# Altium PCB WatcherJet.PcbDoc (part 1 of 3)
Units mm, origin at the board's own origin, x right, y up, seen from the top; angles counter-clockwise.
Board outline 160 x 115 mm, 2 copper layers (Top Layer, Bottom Layer); 119 components, 123 nets, 459 pads, 208 vias.
Unrouted connection lines stored in the file: 1.
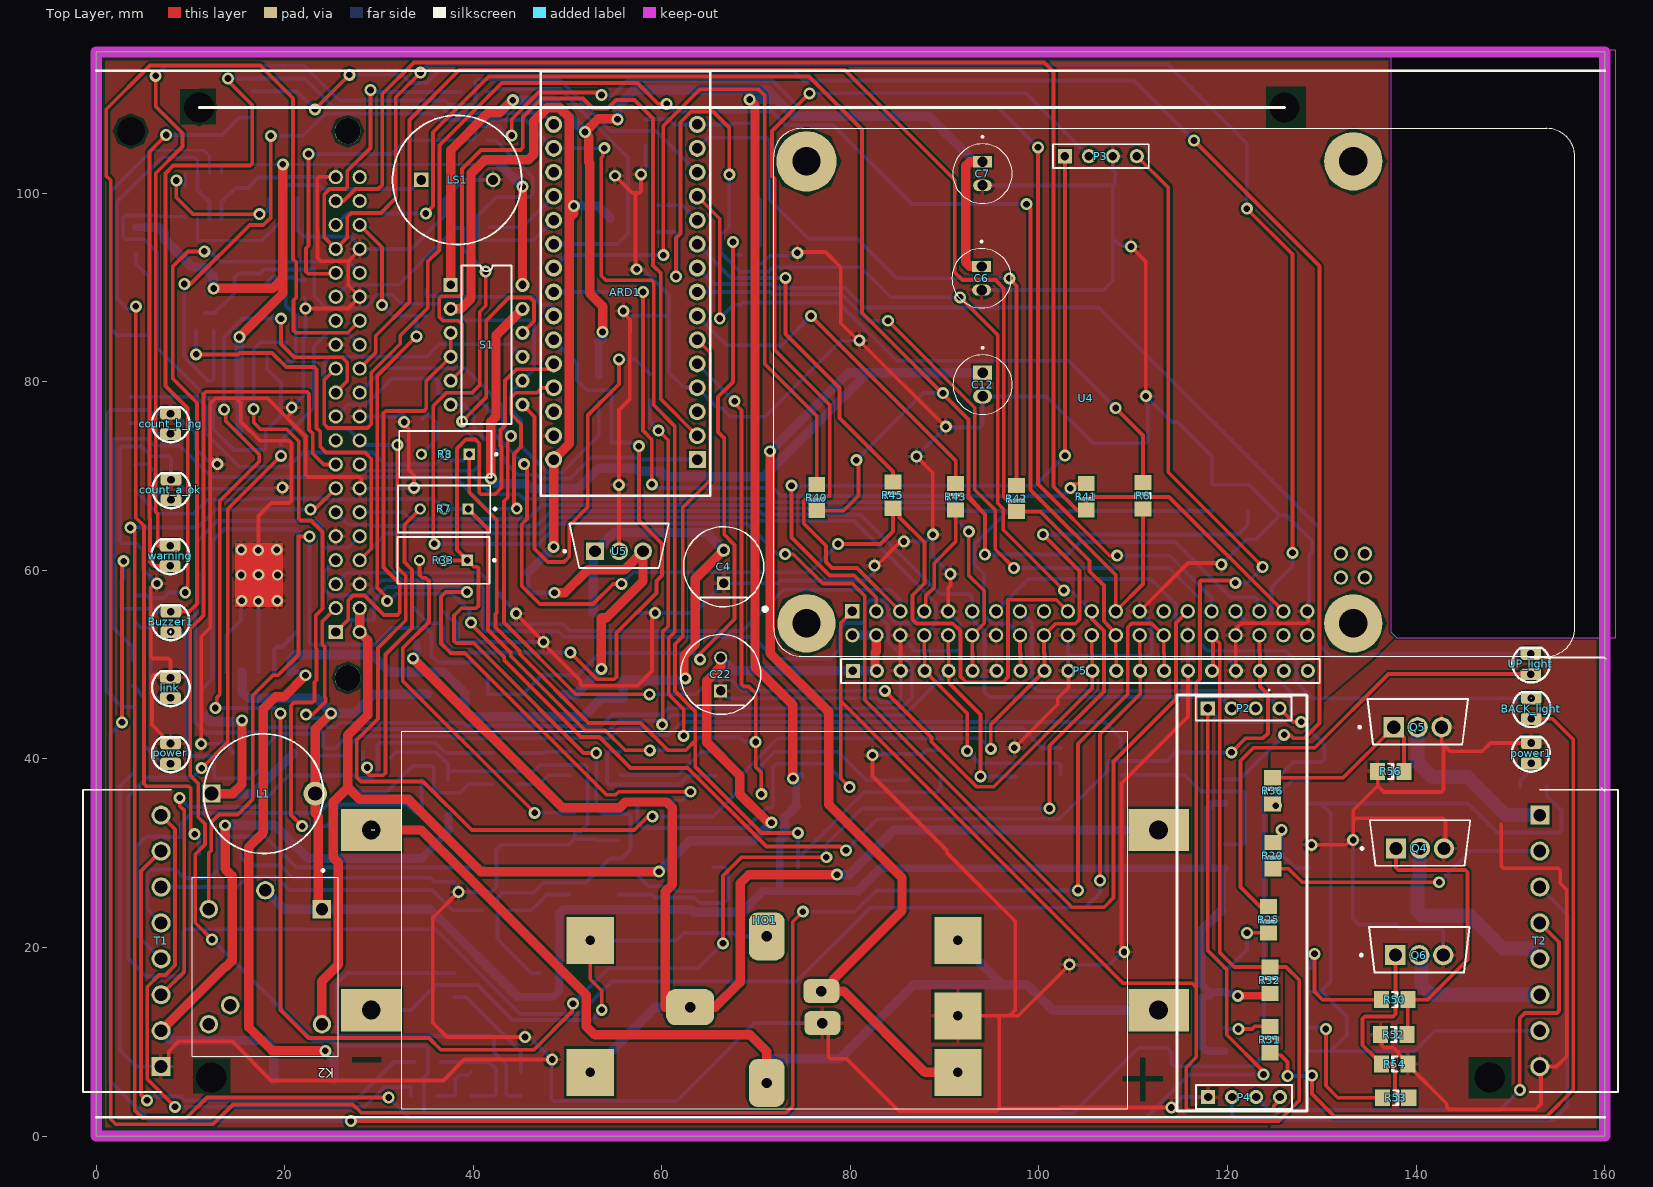
[diagram p0: Top Layer view]
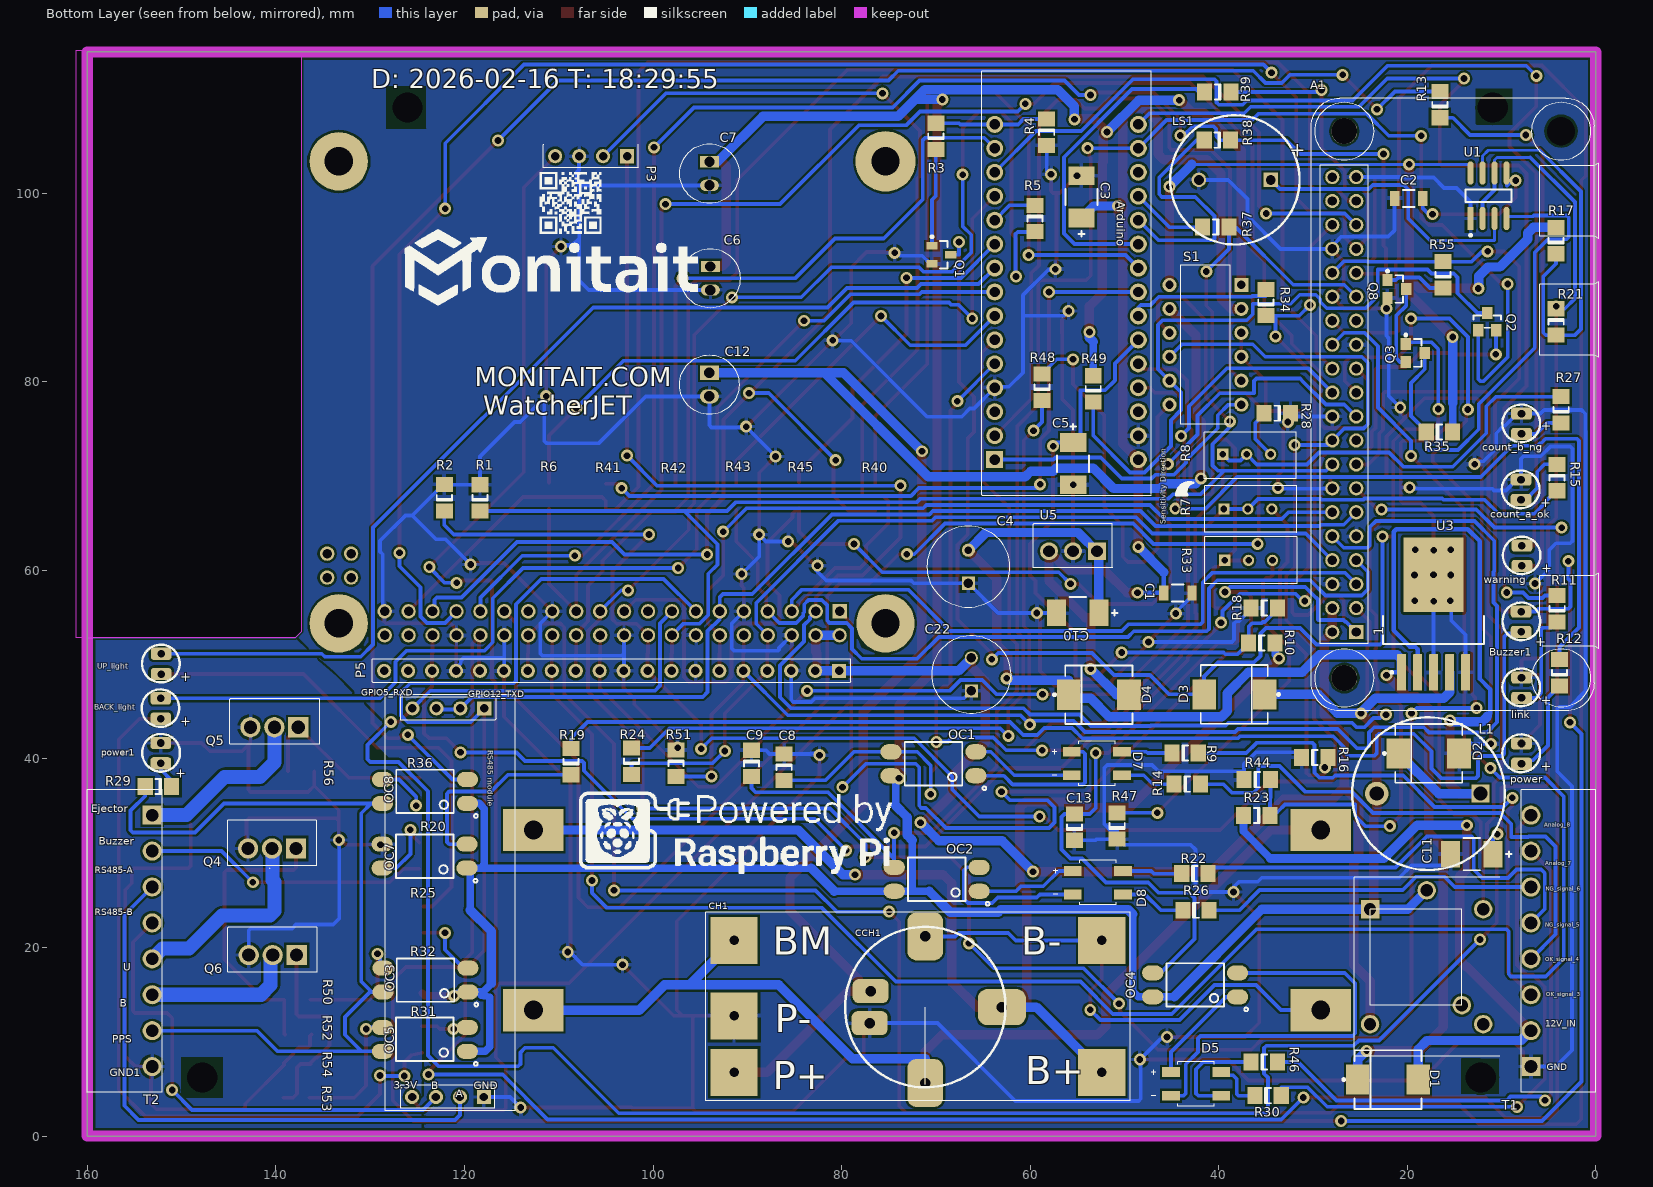
[diagram p1: Bottom Layer view, seen from below]

## Layer stack, top to bottom
Top Solder: solder mask 0.0102, Solder Resist, Dk 3.5
Top Layer: signal copper 0.0356
Dielectric 1: dielectric 0.32, FR-4, Dk 4.8
Bottom Layer: signal copper 0.0356
Bottom Solder: solder mask 0.0102, Solder Resist, Dk 3.5

## Board outline
0,0 159.999,0 159.999,115 0,115
cut-out: 137.315,53.505 137.967,52.853 161.191,52.853 161.194,115.163 137.315,115.163

## Design rules (kind name [scope] priority, off if disabled: settings)
Clearance Clearance_1 [All] p1: gap=0.254 ignorepadtopadclearanceinfootprint=FALSE except(0.7: SMDPad-Via THPad-Via Via-Via)
Clearance [All] p2: gap=0.2 ignorepadtopadclearanceinfootprint=FALSE
ComponentClearance [All] p1: gap=0 collisioncheckmode=3 verticalgap=0 showdistances=FALSE
PolygonConnect [All] p1: connectstyle=Relief reliefconductorwidth=0.4 reliefentries=4 polygonreliefangle="90 Angle" airgapwidth=0.3
RoutingVias [All] p1: holewidth=0.711 width=1.27 viastyle="Through Hole" minholewidth=0.711 minwidth=1.27 maxholewidth=0.711 maxwidth=1.27
SMDNeckDown [All] p1: percent=50.000
SilkToSilkClearance [All] p1: silktosilkclearance=-0.025
SolderMaskExpansion [All] p1: expansion=0.102 istentingtop=FALSE
UnConnectedPin [All] p1:
UnRoutedNet [All] p1: checkbadconnections=TRUE
Width "Schematic Width Constraint_15" [InNet('U')] p1: maxlimit=2 minlimit=0.254 preferedwidth=1 minimp=50.000000 maximp=50.000000 favimp=50.000000
Width "Schematic Width Constraint_14" [InNet('B')] p2: maxlimit=2 minlimit=0.254 preferedwidth=1 minimp=50.000000 maximp=50.000000 favimp=50.000000
Width "Schematic Width Constraint_13" [InNet('3.7v')] p3: maxlimit=2 minlimit=0.254 preferedwidth=1 minimp=50.000000 maximp=50.000000 favimp=50.000000
Width "Schematic Width Constraint_2" [InNet('7.4v')] p4: maxlimit=2 minlimit=0.254 preferedwidth=1 minimp=50.000000 maximp=50.000000 favimp=50.000000
Width "Schematic Width Constraint_12" [InNet('AR_IN_9V')] p5: maxlimit=2 minlimit=0.254 preferedwidth=1 minimp=50.000000 maximp=50.000000 favimp=50.000000
Width "Schematic Width Constraint_6" [InNet('SW12')] p6: maxlimit=2 minlimit=0.254 preferedwidth=1 minimp=50.000000 maximp=50.000000 favimp=50.000000
Width "Schematic Width Constraint_10" [InNet('NetD2_1')] p7: maxlimit=2 minlimit=0.254 preferedwidth=1 minimp=50.000000 maximp=50.000000 favimp=50.000000
Width "Schematic Width Constraint_8" [InNet('NetC4_2')] p8: maxlimit=2 minlimit=0.254 preferedwidth=1 minimp=50.000000 maximp=50.000000 favimp=50.000000
Width "Schematic Width Constraint_7" [InNet('5V')] p9: maxlimit=2 minlimit=0.254 preferedwidth=1 minimp=50.000000 maximp=50.000000 favimp=50.000000
Width "Schematic Width Constraint_3" [InNet('SW11')] p10: maxlimit=2 minlimit=0.254 preferedwidth=1 minimp=50.000000 maximp=50.000000 favimp=50.000000
Width "Schematic Width Constraint_1" [InNet('5V_RPI')] p11: maxlimit=2 minlimit=0.254 preferedwidth=1 minimp=50.000000 maximp=50.000000 favimp=50.000000
Width "Schematic Width Constraint" [InNet('12V-24V-INPUT')] p12: maxlimit=2 minlimit=0.254 preferedwidth=1 minimp=50.000000 maximp=50.000000 favimp=50.000000
Width [All] p13: maxlimit=4 minlimit=0.1 preferedwidth=0.4
27 further rules are at their usual default settings.

## Components (designator, comment, footprint, x,y, rotation, side; value= is the part's Value field where it differs from the comment)
A1 "ADA3708" ADA3708_RPI-ZERO 26.67,77.597 r90 bottom
ARD1 "Nano R3" Arduino_Nano_R3 56.134,89.535 r180 top
BACK_light "LED5_BLUE" LED-3mm#1 152.343,45.288 r180 top
Buzzer1 "LED1_RED" LED-3mm#2 7.793,54.495 r0 top
C1 "0.1UF" FP-1206-L_3_2_0_2-W_1_6_0-MFG 44.321,57.587 r180 bottom
C2 "0.1UF" FP-1206-L_3_2_0_2-W_1_6_0-MFG 19.835,99.469 r0 bottom
C3 "10UF" FP-TAJC-MFG 54.546,99.618 r270 bottom
C4 "1000uF" FP-RAD-TH-D_8_0_5-L_15_1-MFG#1 66.547,60.399 r90 top
C5 "10UF" FP-TAJC-MFG 55.437,71.333 r90 bottom
C6 "220uF16v" CAPPRD250W50D630H1650#1 93.911,90.989 r270 top
C7 "220uF16v" CAPPRD250W50D630H1650#1 94.008,102.096 r270 top
C8 "C1206" 1206 86.087,39.137 r270 bottom value=100nF
C9 "C1206" 1206 89.559,39.522 r270 bottom value=10nf
C10 "10UF" FP-TAJC-MFG 54.958,55.491 r180 bottom
C11 "10UF" FP-TAJC-MFG 13.139,29.901 r180 bottom
C12 "220uF16v" CAPPRD250W50D630H1650#2 94.019,79.713 r270 top
C13 "C1206" 1206 55.295,32.774 r90 bottom value=100nF
C22 "1000uF" FP-RAD-TH-D_8_0_5-L_15_1-MFG#2 66.229,48.97 r90 top
CCH1 "CCH" PCBComponent_1#1 71.119,13.679 r180 bottom
CH1 "2-cell charer module" PCBComponent_1#2 49.397,23.752 r0 bottom
count_a_ok "LED5_BLUE" LED-3mm#1 8.05,68.498 r180 top
count_b_ng "LED3_BLUE" LED-3mm#1 7.998,75.497 r180 top
D1 "SS34-E3/57T" FP-95402-MFG#1 22.032,5.988 r180 bottom
D2 "SS34-E3/57T" FP-95402-MFG#2 17.714,40.586 r180 bottom
D3 "SS34-E3/57T" FP-95402-MFG#1 38.339,46.845 r0 bottom
D4 "SS34-E3/57T" FP-95402-MFG#1 52.711,46.818 r180 bottom
D5 "MB10F-13" DIOB_MB10F-13 42.397,5.526 r180 bottom
D7 "MB10F-13" DIOB_MB10F-13 52.91,39.518 r180 bottom
D8 "MB10F-13" DIOB_MB10F-13 52.8,26.879 r180 bottom
HO1 "2-cell battry holder" PCBComponent_1#3 109.414,42.916 r180 top
K2 "1-1721150-3" RELAY_1-1721150-3 17.931,17.966 r270 top
L1 "AIUR-06-100K" ABRA-AIUR-06-2_V 17.741,36.323 r0 top
link "LED4_RED" LED-3mm#1 7.996,47.496 r180 top
LS1 "KPEG242" KINGS-KPEG242-2 38.279,101.43 r0 top
OC1 "PC81713NIP0X" SOT254P1025X400-4N 70.25,39.492 r0 bottom
OC2 "PC81713NIP0X" SOT254P1025X400-4N 69.906,27.238 r0 bottom
OC3 "PC81713NIP0X" SOT254P1025X400-4N 124.138,16.548 r0 bottom
OC4 "PC81713NIP0X" SOT254P1025X400-4N 42.487,16.033 r0 bottom
OC5 "PC81713NIP0X" SOT254P1025X400-4N 124.194,10.255 r0 bottom
OC7 "a" SOT254P1025X400-4N 124.232,29.688 r0 bottom
OC8 "a" SOT254P1025X400-4N 124.185,36.555 r0 bottom
P2 "Header 4" HDR1X4 117.895,45.364 r0 top
P3 "Header 4" HDR1X4 102.758,103.943 r0 top
P4 "Header 4" HDR1X4 117.941,4.142 r0 top
P5 "Header 20" HDR1X20 80.256,49.346 r0 top
power "LED2_GREEN" LED-3mm#1 8,40.5 r180 top
power1 "LED2_GREEN" LED-3mm#2 152.085,40.552 r0 top
Q1 "BCX19" ONSC-SOT-23-3-318-08_V#1 69.404,93.493 r180 bottom
Q2 "BSS138" FP-318-08-IPC_B 11.515,86.388 r90 bottom
Q3 "BCX19" ONSC-SOT-23-3-318-08_V#2 19.139,83.072 r180 bottom
Q4 "IRF3205LPBF" FP-PG-TO262-3-MFG 140.416,31.087 r90 top
Q5 "IRF3205LPBF" FP-PG-TO262-3-MFG 140.165,43.951 r90 top
Q6 "IRF3205LPBF" FP-PG-TO262-3-MFG 140.345,19.778 r90 top
Q8 "BCX19" ONSC-SOT-23-3-318-08_V#2 21.086,89.854 r180 bottom
R1 "33K" 1206 118.352,67.69 r90 bottom
R2 "33K" 1206 122.142,67.719 r90 bottom
R3 "1K" 1206 70.004,106.033 r90 bottom
R4 "1K" 1206 58.243,106.474 r270 bottom
R5 "1K" 1206 59.494,97.332 r270 bottom
R6 "1K" 1206 111.04,67.932 r270 top
R7 "3296W-1-103LF" FP-3296W-MFG#1 36.897,66.516 r90 top
R8 "3296W-1-103LF" FP-3296W-MFG#1 37.026,72.319 r90 top
R9 "1K" 1206 43.557,40.62 r180 bottom
R10 "33K" 1206 35.415,52.292 r180 bottom
R11 "1K" 1206 4.089,55.931 r90 bottom
R12 "1K" 1206 3.835,49.156 r90 bottom
R13 "270OHM" 1206 16.538,109.416 r90 bottom
R14 "1K" 1206 43.326,37.322 r180 bottom
R15 "1K" 1206 4.099,69.853 r270 bottom
R16 "1K" 1206 29.82,40.157 r180 bottom
R17 "68K" 1206 4.211,94.994 r90 bottom
R18 "33K" 1206 35.146,56.009 r180 bottom
R19 "270OHM" 1206 108.702,39.728 r90 bottom
R20 "1K" 1206 124.804,29.753 r90 top
R21 "68K" 1206 4.191,86.36 r270 bottom
R22 "1K" 1206 42.516,27.831 r180 bottom
R23 "68K" 1206 35.961,33.995 r0 bottom
R24 "10K" 1206 102.272,39.764 r90 bottom
R25 "270OHM" 1206 124.366,22.96 r90 top
R26 "1K" 1206 42.4,23.954 r180 bottom
R27 "1K" 1206 3.659,77.03 r90 bottom
R28 "1K" 1206 33.783,76.675 r0 bottom
R29 "1K" 1206 152.463,37.072 r0 bottom
R30 "1K" 1206 34.761,4.278 r180 bottom
R31 "270OHM" 1206 124.496,10.236 r270 top
R32 "1K" 1206 124.495,16.543 r270 top
R33 "3296W-1-103LF" FP-3296W-MFG#2 36.825,61.061 r90 top
R34 "1K" 1206 34.999,88.422 r90 bottom
R35 "68K" 1206 16.573,74.678 r180 bottom
R36 "1K" 1206 124.773,36.606 r270 top
R37 "1K" 1206 40.313,96.415 r0 bottom
R38 "1K" 1206 40.122,105.64 r0 bottom
R39 "1K" 1206 40.096,110.755 r0 bottom
R40 "1K" 1206 76.427,67.736 r90 top
R41 "1K" 1206 105.012,67.806 r90 top
R42 "1K" 1206 97.625,67.63 r90 top
R43 "1K" 1206 91.159,67.811 r270 top
R44 "33K" 1206 35.907,37.799 r180 bottom
R45 "1K" 1206 84.512,67.992 r270 top
R46 "1K" 1206 35.174,7.841 r180 bottom
R47 "1K" 1206 50.761,32.889 r90 bottom
R48 "2.2K" 1206 58.726,79.439 r90 bottom
R49 "10K" 1206 53.301,79.255 r90 bottom
R50 "1K" 1206 137.728,14.464 r180 top
R51 "3.3K" 1206 97.56,39.554 r270 bottom
R52 "1K" 1206 137.632,10.762 r180 top
R53 "1K" 1206 137.825,4.062 r180 top
R54 "1K" 1206 137.735,7.637 r0 top
R55 "10K" 1206 16.199,91.355 r90 bottom
R56 "1K" 1206 137.33,38.689 r180 top
S1 "SW DIP-6" DIP-12/SW 41.402,83.936 r270 top
T1 "1803332" SHDRRA8W83P0X381_1X8_3187X920X 6.873,20.701 r90 top
T2 "1803332" SHDRRA8W83P0X381_1X8_3187X920X 153.126,20.704 r270 top
U1 "NE555DRG4" FP-D0008A-IPC_A 11.368,99.744 r90 bottom
U3 "LM2596SX-ADJ/NOPB" KTT0005B_L 17.199,55.392 r90 bottom
U4 "RASPBERRY_PI_3_MODEL_B+" MODULE_RASPBERRY_PI_3_MODEL_B+ 114.338,78.892 r0 top
U5 "LM7815CT/NOPB" FP-NDE0003B-MFG 55.453,62.61 r90 top
UP_light "LED5_BLUE" LED-3mm#1 152.305,50.017 r180 top
warning "LED1_RED" LED-3mm#1 7.949,61.498 r180 top

## Footprints (in the part's own frame and the unit in brackets; to place one, negate y for a bottom-side part, rotate by r counter-clockwise, add the part's x,y. Pads: shape width x height; smd on the part's side, far side on the other; paste and mask are expansions set on the pad)
1206 [mm] "Chip Capacitor; Body 3.2 x 1.6 mm (LxW typ)"
  rect 1.6x1.8 smd: 1(-1.4,0) 2(1.4,0)
  silkscreen extent -0.3,-0.8 0.3,0.8
ABRA-AIUR-06-2_V [mm] "Through Hole, 2-Leads, Dia 12.7mm"
  rect 1.9x1.9 hole 1.5: 1(-5.515,0)
  round 2.5 hole 1.5: 2(5.485,0)
  silkscreen extent -6.35,-6.35 6.35,6.35, body extent -6.35,-6.35 6.35,6.35, height 18
ADA3708_RPI-ZERO [mm]
  rect 1.508x1.508 hole 1: 1(-24.13,-1.27)
  round 1.508 hole 1: 2(-24.13,1.27) 3(-21.59,-1.27) 4(-21.59,1.27) 5(-19.05,-1.27) 6(-19.05,1.27) 7(-16.51,-1.27) 8(-16.51,1.27) 9(-13.97,-1.27) 10(-13.97,1.27) 11(-11.43,-1.27) 12(-11.43,1.27) 13(-8.89,-1.27) 14(-8.89,1.27) 15(-6.35,-1.27) 16(-6.35,1.27) 17(-3.81,-1.27) 18(-3.81,1.27) 19(-1.27,-1.27) 20(-1.27,1.27) 21(1.27,-1.27) 22(1.27,1.27) 23(3.81,-1.27) 24(3.81,1.27) 25(6.35,-1.27) 26(6.35,1.27) 27(8.89,-1.27) 28(8.89,1.27) 29(11.43,-1.27) 30(11.43,1.27) 31(13.97,-1.27) 32(13.97,1.27) 33(16.51,-1.27) 34(16.51,1.27) 35(19.05,-1.27) 36(19.05,1.27) 37(21.59,-1.27) 38(21.59,1.27) 39(24.13,-1.27) 40(24.13,1.27)
  round 0 all layers, no hole: ""(-29,-23)
  round 2.75 hole 2.75 unplated: ""(-29,0) ""(29,0)
  round 2.75 hole 3 unplated: ""(29,-23)
  silkscreen extent -32.5,-27 32.5,3.5
Arduino_Nano_R3 [mm] "Arduino Nano R3, 30-Leads, Row Spacing 15.24mm, Pitch 2.54mm"
  rect 1.8x1.8 hole 1.1: 1(-7.62,17.78)
  round 1.8 hole 1.1: 2(-7.62,15.24) 3(-7.62,12.7) 4(-7.62,10.16) 5(-7.62,7.62) 6(-7.62,5.08) 7(-7.62,2.54) 8(-7.62,0) 9(-7.62,-2.54) 10(-7.62,-5.08) 11(-7.62,-7.62) 12(-7.62,-10.16) 13(-7.62,-12.7) 14(-7.62,-15.24) 15(-7.62,-17.78) 16(7.62,-17.78) 17(7.62,-15.24) 18(7.62,-12.7) 19(7.62,-10.16) 20(7.62,-7.62) 21(7.62,-5.08) 22(7.62,-2.54) 23(7.62,0) 24(7.62,2.54) 25(7.62,5.08) 26(7.62,7.62) 27(7.62,10.16) 28(7.62,12.7) 29(7.62,15.24) 30(7.62,17.78)
  silkscreen extent -9,-23.4 9,21.6, body extent -9,-23.4 9,21.6, height 12.72
CAPPRD250W50D630H1650#1 [mm]
  oval 1.2x2 hole 1.1: N(1.25,0)
  rect 1.2x2 hole 1.1: P(-1.25,0)
  silkscreen extent -4,-3.15 3.15,3.15
CAPPRD250W50D630H1650#2 [mm]
  oval 1.5x2 hole 1.1: N(1.25,0)
  rect 1.5x2 hole 1.1: P(-1.25,0)
  silkscreen extent -4,-3.15 3.15,3.15
DIOB_MB10F-13 [mm]
  rect 1.875x1.05 smd: 1(-2.662,1.25) 2(2.662,1.25) 3(-2.662,-1.25) 4(2.662,-1.25)
  silkscreen extent -4.75,-2.36 1.92,2.36, body extent -3.35,-2.36 3.35,2.36, height 1.8
DIP-12/SW [mm] "DIP Switch; 12 Leads"
  rect 1.5x1.5 hole 0.9: 1(-6.35,-3.81)
  round 1.5 hole 0.9: 2(-3.81,-3.81) 3(-1.27,-3.81) 4(1.27,-3.81) 5(3.81,-3.81) 6(6.35,-3.81) 7(6.35,3.81) 8(3.81,3.81) 9(1.27,3.81) 10(-1.27,3.81) 11(-3.81,3.81) 12(-6.35,3.81)
  silkscreen extent -8.43,-2.65 8.41,2.65
FP-318-08-IPC_B [mm]
  rect 1.3x1.1 smd: 1(-0.91,0.95) 2(-0.91,-0.95) 3(0.91,0)
  silkscreen extent -0.65,-1.45 0.65,1.45, body extent -1.2,-1.45 1.2,1.45, height 1.11
FP-1206-L_3_2_0_2-W_1_6_0-MFG [mm]
  rect 1x1.6 smd paste+0 mask+0: 1(-1.5,0) 2(1.5,0)
  silkscreen extent -0.62,-0.9 0.63,0.9, body extent -1.6,-0.8 1.6,0.8, height 0.94
FP-3296W-MFG#1 [mm]
  rect 1.2x1.2 hole 0.7: 1(0.005,-2.54)
  round 1.2 hole 0.7: 2(0.005,0) 3(0.005,2.54)
  silkscreen extent -2.48,-5.53 2.48,4.89, body extent -2.58,-4.99 2.58,4.99, height 0.25
FP-3296W-MFG#2 [mm]
  rect 1.2x1.2 hole 0.7 paste-1000 mask+0: 1(0.005,-2.54)
  round 1.2 hole 0.7 paste-1000 mask+0: 2(0.005,0) 3(0.005,2.54)
  silkscreen extent -2.48,-5.53 2.48,4.89, body extent -2.58,-4.99 2.58,4.99, height 0.25
FP-95402-MFG#1 [mm]
  rect 2.5x3.2 smd paste+0 mask+0: 1(-3.205,0) 2(3.205,0)
  silkscreen extent -4.83,-3.11 3.56,3.11, body extent -3.97,-2.95 3.97,2.95, height 2.62
FP-95402-MFG#2 [mm]
  rect 2.5x3.2 smd paste+0 mask+0: 1(-3.205,0)
  rect 2.52x3.2 smd paste+0 mask+0: 2(3.205,0)
  silkscreen extent -4.83,-3.11 3.55,3.11, body extent -3.97,-2.95 3.97,2.95, height 2.62
FP-D0008A-IPC_A [mm]
  rect 2.469x0.622 smd paste+0 mask+0: 1(-2.414,1.905)
  rrect100% 2.469x0.622 smd paste+0 mask+0: 2(-2.414,0.635) 3(-2.414,-0.635) 4(-2.414,-1.905) 5(2.414,-1.905) 6(2.414,-0.635) 7(2.414,0.635) 8(2.414,1.905)
  silkscreen extent -4.32,-2.45 0.68,2.45, body extent -3,-2.45 3,2.45, height 1.75
FP-NDE0003B-MFG [mm]
  rect 1.9x1.9 hole 1.25 paste-1000 mask+0: 1(-0.572,2.54)
  round 1.9 hole 1.25 paste-1000 mask+0: 2(-0.572,0) 3(-0.572,-2.54)
  silkscreen extent -2.35,-5.27 2.35,5.89, body extent -2.45,-5.37 2.45,5.37, height 0.25
FP-PG-TO262-3-MFG [mm]
  rect 2.15x2.15 hole 1.4 paste-1000 mask+0: 1(-0.582,2.54)
  round 2.15 hole 1.4 paste-1000 mask+0: 2(-0.582,0) 3(-0.582,-2.54)
  silkscreen extent -2.42,-5.34 2.42,6.27, body extent -2.51,-5.56 2.51,5.56, height 0.25
FP-RAD-TH-D_8_0_5-L_15_1-MFG#1 [mm]
  rect 1.4x1.4 hole 1: 1(-1.75,0)
  round 1.4 hole 0.8: 2(1.75,0)
  silkscreen extent -4.25,-4.25 4.25,4.25, body extent -4.35,-4.35 4.35,4.35, height 0.25
FP-RAD-TH-D_8_0_5-L_15_1-MFG#2 [mm]
  rect 1.4x1.4 hole 1: 1(-1.75,0)
  round 1.4 hole 1: 2(1.75,0)
  silkscreen extent -4.25,-4.25 4.25,4.25, body extent -4.35,-4.35 4.35,4.35, height 0.25
FP-TAJC-MFG [mm]
  rect 2x2.8 smd paste+0 mask+0: 1(-2.25,0) 2(2.25,0)
  silkscreen extent -0.87,-1.7 4.22,1.7, body extent -3,-1.6 3,1.6, height 2.8
HDR1X4 [mm] "Connector; Header; 4 Position"
  rect 1.5x1.5 hole 0.9: 1(0,0)
  round 1.5 hole 0.9: 2(2.54,0) 3(5.08,0) 4(7.62,0)
  silkscreen extent -1.27,-1.27 8.89,1.27
HDR1X20 [mm] "Connector; Header; 20 Position"
  rect 1.5x1.5 hole 0.9: 1(0,0)
  round 1.5 hole 0.9: 2(2.54,0) 3(5.08,0) 4(7.62,0) 5(10.16,0) 6(12.7,0) 7(15.24,0) 8(17.78,0) 9(20.32,0) 10(22.86,0) 11(25.4,0) 12(27.94,0) 13(30.48,0) 14(33.02,0) 15(35.56,0) 16(38.1,0) 17(40.64,0) 18(43.18,0) 19(45.72,0) 20(48.26,0)
  silkscreen extent -1.27,-1.27 49.53,1.27
KINGS-KPEG242-2 [mm] "THD, 2-Leads, Dia 13.7mm, Pitch 7.62mm"
  rect 1.55x1.55 hole 1.05: 1(-3.81,0)
  round 1.55 hole 1.05: 2(3.81,0)
  silkscreen extent -6.85,-6.85 6.85,6.85, body extent -6.85,-6.85 6.85,6.85, height 7.6
KTT0005B_L [mm] "DPAK, 5-Leads, Body 10.65x9.65mm, Pitch 1.7mm, IPC High Density"
  rrect11% 3.85x0.95 smd: 1(-6.2,3.4) 2(-6.2,1.7) 3(-6.2,0) 4(-6.2,-1.7) 5(-6.2,-3.4)
  rrect2% 7.9x6.4 smd: 6(4.15,0)
  silkscreen extent -6.32,-5.35 -0.2,5.35, body extent -3.2,-5.32 6.45,5.33, height 4.83
LED-3mm#1 [mm] "LED; 2 Leads"
  rrect50% 2.2x1.3 hole 0.8: 1(0.127,1.016) 2(0.127,-1.143)
  silkscreen extent -1.9,-1.81 2.09,1.89
LED-3mm#2 [mm]
  rrect50% 2.2x1.3 hole 0.8: 1(0.127,-1.016) 2(0.127,1.143)
  silkscreen extent -1.9,-1.89 2.09,1.81
MODULE_RASPBERRY_PI_3_MODEL_B+ [mil]
  rect 60x60 / inner round 60 / far side rect 60x60 hole 40: 1(-1343.7,-914.57)
  round 60 hole 40: 2(-1343.7,-1014.57) 3(-1243.7,-914.57) 4(-1243.7,-1014.57) 5(-1143.7,-914.57) 6(-1143.7,-1014.57) 7(-1043.7,-914.57) 8(-1043.7,-1014.57) 9(-943.7,-914.57) 10(-943.7,-1014.57) 11(-843.7,-914.57) 12(-843.7,-1014.57) 13(-743.7,-914.57) 14(-743.7,-1014.57) 15(-643.7,-914.57) 16(-643.7,-1014.57) 17(-543.7,-914.57) 18(-543.7,-1014.57) 19(-443.7,-914.57) 20(-443.7,-1014.57) 21(-343.7,-914.57) 22(-343.7,-1014.57) 23(-243.7,-914.57) 24(-243.7,-1014.57) 25(-143.7,-914.57) 26(-143.7,-1014.57) 27(-43.7,-914.57) 28(-43.7,-1014.57) 29(56.3,-914.57) 30(56.3,-1014.57) 31(156.3,-914.57) 32(156.3,-1014.57) 33(256.3,-914.57) 34(256.3,-1014.57) 35(356.3,-914.57) 36(356.3,-1014.57) 37(456.3,-914.57) 38(456.3,-1014.57) 39(556.3,-914.57) 40(556.3,-1014.57) 41(796.46,-673.5) 42(796.46,-773.5) 43(696.46,-673.5) 44(696.46,-773.5)
  round 244.09 hole 118.11: S1(-1535.43,-964.57) S2(748.03,-964.57)
  oval 0x244.09 all layers, no hole: S3(748.03,964.57) S4(-1535.43,964.57)
  silkscreen extent -1717,-1102 1673,1102, body extent -1673,-1102 1783,1181, height 79
ONSC-SOT-23-3-318-08_V#1 [mm] "SOT23, 3-Leads, Body 2.92x1.3mm, Pitch 0.95mm"
  rect 1.2x0.8 smd: 1(-1,0.95) 2(-1,-0.95) 3(1,0)
  silkscreen extent -1.13,-1.46 0.65,2.02, body extent -0.65,-1.46 0.65,1.46, height 1.11
ONSC-SOT-23-3-318-08_V#2 [mm] "SOT23, 3-Leads, Body 2.92x1.3mm, Pitch 0.95mm"
  rect 1.1x1.3 smd: 1(-1,0.95) 2(-1,-0.95) 3(1,0)
  silkscreen extent -1.13,-1.46 0.65,2.02, body extent -0.65,-1.46 0.65,1.46, height 1.11
PCBComponent_1#1 [mm]
  rrect50% 3.81x2.54 hole 1.1: 1(-5.8,1.7) 4(-5.9,-1.7)
  rrect50% 3.81x5.08 hole 1.1: 2(0,7.5) 3(0,-8.05)
  rrect50% 5.08x3.81 hole 1.1: 5(8.128,0)
  silkscreen extent -8.51,-8.51 8.51,8.51
PCBComponent_1#2 [mm]
  rect 5x5 hole 1: 1(42,11) 2(42,17) 3(42,3) 4(3,3) 5(3,17)
  silkscreen extent 0,0 45,20
PCBComponent_1#3 [mm]
  rect 6.4x4.5 hole 2: 1(-3.275,29.55) 2(80.25,29.55) 3(-3.275,10.45) 4(80.25,10.45)
  silkscreen extent 0,0 80.25,40
RELAY_1-1721150-3 [mm]
  rect 1.95x1.95 hole 1.3: A1(-6.1,6)
  round 1.95 hole 1.3: A2(-6.1,-6) COM(-8.1,0) NC(6.1,6) NO(6.1,-6)
  silkscreen extent -10.3,-7.75 9.5,7.75
SHDRRA8W83P0X381_1X8_3187X920X [mm]
  rect 2.025x2.025 / inner round 2.025 / far side rect 2.025x2.025 hole 1.35: 1(-13.335,0)
  round 2.025 hole 1.35: 2(-9.525,0) 3(-5.715,0) 4(-1.905,0) 5(1.905,0) 6(5.715,0) 7(9.525,0) 8(13.335,0)
  silkscreen extent -16.04,-1.05 16.04,8.3
SOT254P1025X400-4N [mm]
  oval 2.25x1.6 smd: 1(-4.5,1.27) 2(-4.5,-1.27) 3(4.5,-1.27) 4(4.5,1.27)
  silkscreen extent -5.6,-2.3 3.05,2.8, body extent -4.87,-2.29 4.88,2.29, height 4

## Part data
A1: "Raspberry Pi Zero WH (Zero W with Headers)", Package=None, Availability=Unavailable, MP=ADA3708, Price=None
ARD1: library part "Arduino Nano R3", "Arduino Nano R3"
BACK_light count_a_ok count_b_ng link power power1 UP_light warning: library part "LED 3mm", "Typical LED", Designer="Seyed Mohsen Ghasemian", PackageDescription="LED; 2 Leads", PackageReference=LED, Published=02/04/2012, Publisher=www.picpars.com
Buzzer1: library part "LED 3mm_2", "Typical LED", Designer="Seyed Mohsen Ghasemian", PackageDescription="LED; 2 Leads", PackageReference=LED, Published=02/04/2012, Publisher=www.picpars.com
C1 C2: library part CMP-2000-05018-2, "General Purpose Ceramic Capacitor, 1206, 100nF, 10%, X7R, 15%, 50V", Capacitance=100nF, Case Code (Imperial)=1206, Case Code (Metric)=3216, Dielectric=X7R, Dielectric Material=Ceramic, Insulation Resistance=100GR, Max Operating Temperature=125°C, Min Operating Temperature=-55°C, Package Quantity=1, Tolerance=10%, Voltage=50V, Case/Package=1206, Construction=Flat, Contact Plating=Tin, Depth=1.6mm, Dissipation Factor=2.5%, Height=0.94mm, Lead Free="Lead Free", Length=3.2mm, Mount="Surface Mount", Number of Pins=2, Packaging="Tape and Reel", Radiation Hardening=No, REACH SVHC="No SVHC", RoHS Compliant=Yes, Series=-, Termination=SMD/SMT, Thickness=0.037inch, Voltage Rating=50V, Voltage Rating (DC)=50V, Width=1.6mm
C3 C5 C10 C11: library part CMP-04424-000120-1, "10uF 35V  ±10% 1.6Ω 2312  SMD Tantalum Capacitor", Capacitance=10uF, Case Code (Imperial)=2412, Case Code (Metric)=6032, Case/Package=Molded, Dielectric Material=Tantalum, ESR (Equivalent Series Resistance)=1.6R, Leakage Current=3.5uA, Max Operating Temperature=125°C, Min Operating Temperature=-55°C, Package Quantity=1, Tolerance=20%, Voltage=25V, Voltage Rating=35V, Construction=Flat, Depth=3.2mm, Dissipation Factor=6%, Features="General Purpose", Height=2.6mm, Height - Seated (Max)=0.11inch, Lead Free="Lead Free", Length=6mm, Mount="Surface Mount", Number of Pins=2, Packaging="Tape and Reel", Polarity=Polar, Radiation Hardening=No, REACH SVHC="No SVHC", RoHS Compliant=Yes, Series=TAJ, Termination=SMD/SMT, Voltage Rating (DC)=35V, Width=3.2mm
C4 C22: library part CMP-05427-001033-1, "Aluminum Electrolytic Capacitors (Radial Lead Type) 1000uF ±20% 10V", Capacitance=1mF, Case/Package=Radial, ESR (Equivalent Series Resistance)=41mR, Max Operating Temperature=105°C, Min Operating Temperature=-40°C, Package Quantity=200, Ripple Current=1.24A, Tolerance=20%, Voltage=10V, Construction=RADIAL, Contact Plating=Tin, Diameter=8mm, Dissipation Factor=0.19%, Height=15mm, Height - Seated (Max)=0.65inch, Impedance=41mR, Lead Diameter=0.6mm, Lead Pitch=3.5mm, Lead/Base Style=Straight, Length=15mm, Life (Hours)=8000Hour, Mount="Through Hole", Number of Pins=2, Packaging=Bulk, Radiation Hardening=No, REACH SVHC="No SVHC", Ripple Current (AC)=1.24A, RoHS Compliant=Yes, Series=FR, Termination=Radial, Voltage Rating=10V, Voltage Rating (DC)=10V
C6 C7 C12: library part UPM1C181MED1TD, "Cap Aluminum Lytic 180uF 16V 20% (6.3 X 15mm) Radial 2.5mm 285mA 2000h 105Â°C Ammo", Package=None, Check_prices=https://www.snapeda.com/parts/UPM1C181MED1TD/Nichicon/view-part/?ref=eda, MF=Nichicon, MP=UPM1C181MED1TD, SnapEDA_Link=https://www.snapeda.com/parts/UPM1C181MED1TD/Nichicon/view-part/?ref=snap
C8 C9 C13: "Ceramic Chip Capacitor - Standard", PackageDocument=Mar-2001, Code_IPC="3216 [1206]", Code_JEITA=1206, ComponentLink1Description="Manufacturer Link", ComponentLink1URL=http://www.kemet.com/, ComponentLink2Description=Datasheet, ComponentLink2URL=http://www.kemet.com/kemet/web/homepage/kechome.nsf/vapubfilesname/F3102TA.pdf/$file/F3102TA.pdf, DatasheetDocument=Mar-2001, LatestRevisionDate=19-Mar-2004, LatestRevisionNote="Silkscreen size reduced.", PackageReference=1206, Published=17-Jul-2002, Publisher="Altium Limited"
CH1: library part "2-cell charger module"
D1 D2 D3 D4: library part CMP-02539-000012-1, "DIODE SCHOTTKY 40V 3A DO214AB", Forward Current=3A, Manufacturer=Vishay, Max Junction Temp=+150°C, Max Repetitive Reverse Voltage=40V, Max Surge Forward Current=100A, Package=95402, Peak Reverse Current=0.5mA, Temperature="-55°C to +150°C", Temperature Range Low=-55°C, Automotive=No, Category=Diode, ComponentLink2Description=Datasheet, ComponentLink2URL=http://www.vishay.com/docs/88751/ss32.pdf, Device Class L1="Discrete Semiconductors", Device Class L2=Diodes, Device Class L3="Schottky Diodes", Digikey Description="DIODE SCHOTTKY 40V 3A DO214AB", Footprint Url=http://www.vishay.com/docs/95402/smc.pdf, Height=2.62mm, Lead Free=Yes, Manufacturer Part Number=SS34-E3/57T, Mouser Description="Schottky Diodes & Rectifiers 3.0 Amp 40 Volt", Octopart=https://octopart.com/ss34-e3%2F57t-vishay-39552907, RoHS=TRUE, Standoff Height=0mm, Temperature Range High=+150°C
D5 D7 D8: "Bridge Rectifier Single Phase Standard 1 kV Surface Mount MBF", Package="SMD-4 Diodes Inc.", Availability="In Stock", Check_prices=https://www.snapeda.com/parts/MB10F-13/Diodes+Inc./view-part/?ref=eda, MF="Diodes Inc.", MP=MB10F-13, Price=None, Purchase-URL=https://pricing.snapeda.com/search/part/MB10F-13/?ref=eda, SnapEDA_Link=https://www.snapeda.com/parts/MB10F-13/Diodes+Inc./view-part/?ref=snap
K2: "ORWH Series Miniature PCB Relay with Wash Tight 1-Pole 1-Form C 1 CO 12 VDC 400 Ohm 360 mW Silver Zinc Oxide", Package=None, Availability=Unavailable, MP=1-1721150-3, Price=None
L1: library part CMP-2000-05038-1, "Fixed Inductor, 10 uH, +/- 10%, -40 to 85 degC, 2-Pin THD, RoHS, Bulk", Case Diameter=12.7mm, Case Length=18mm, Inductance=10uH, Manufacturer=ABRACON, Maximum DC Current=8.8A, Maximum DC Resistance=0.031Ohms, Operating Temperature Range=-40Cto+125C, Package / Case=12.7mmx18mm, Package Description="2-Pin Through Hole Device, Dia 12.7 mm, Pitch 7.37 mm", Package Reference=AIUR-06, Tolerance=10%, Brand=ABRACON, Core Material=Ferrite, Datasheet URL=http://www.abracon.com/Magnetics/radial/AIUR05-06.pdf, Datasheet Version="Rev. 1.1, 08/2004", Factory Pack Quantity=250, Lead Diameter=0.81mm, Lead Spacing=7.37mm, Manufacturer URL=http://www.abracon.com/, Packaging=Bulk, Product=PowerInductors, Product Category=FixedInductors, RoHS=Details, Series=AIUR-06, Shielding=Unshielded, Termination Style=Radial, Type=ThruHolePowerInductor
LS1: library part CMP-2000-06518-1, "Piezo Indicator, 4100 Hz, 3 to 16 V, -20 to 70 degC, 2-Pin THD, RoHS", Current - Max=7A, Frequency Range=3600to4600Hz, Manufacturer=KingstateElectronicsCorp., Maximum Resonant Frequency=4600Hz, Maximum Supply Current=7mA, Operating Temperature=-20to70°C, Package Description="2-Pin Through Hole Device, Body Dia 13.7 mm, Pitch 7.62 mm", PartNumber=KPE-242, Typical Operating Supply Voltage=12Vdc, Category=AudioIndicatorsandAlerts, Datasheet URL=https://datasheet.ciiva.com/11776/0900766b8068f3a2-11776713.pdf, Datasheet Version=01/2006, Manufacturer URL=http://www.kingstate.com.tw/index.php/en/, Minimum Sound Pressure=70dBA, Mounting=ThroughHole, Mounting Technology=ThroughHole, Package Reference=KPEG242, Product Diameter=13.7mm, Product Height=7.6mm, Technology=Piezo, Termination Method=Pin, Tone Mode=Continuous, Type=Indicator
OC1 OC2 OC3 OC4 OC5: "Optoisolator Transistor Output 5000Vrms 1 Channel 4-SMD", Package="SMD-4 SOCLE Technology", Availability="In Stock", Check_prices=https://www.snapeda.com/parts/PC81713NIP0X/SHARP%252FSocle+Technology/view-part/?ref=eda, MF="SHARP/Socle Technology", MP=PC81713NIP0X, Price=None, Purchase-URL=https://pricing.snapeda.com/search/part/PC81713NIP0X/?ref=eda, SnapEDA_Link=https://www.snapeda.com/parts/PC81713NIP0X/SHARP%252FSocle+Technology/view-part/?ref=snap
OC7 OC8: library part PC81713NIP0X, "Optoisolator Transistor Output 5000Vrms 1 Channel 4-SMD", Package="SMD-4 SOCLE Technology", Availability="In Stock", Check_prices=https://www.snapeda.com/parts/PC81713NIP0X/SHARP%252FSocle+Technology/view-part/?ref=eda, MF="SHARP/Socle Technology", MP=PC81713NIP0X, Price=None, Purchase-URL=https://pricing.snapeda.com/search/part/PC81713NIP0X/?ref=eda, SnapEDA_Link=https://www.snapeda.com/parts/PC81713NIP0X/SHARP%252FSocle+Technology/view-part/?ref=snap
P2 P3 P4: "Header, 4-Pin", LatestRevisionDate=17-Jul-2002, LatestRevisionNote="Re-released for DXP Platform.", Publisher="Altium Limited"
P5: "Header, 20-Pin", LatestRevisionDate=17-Jul-2002, LatestRevisionNote="Re-released for DXP Platform.", Publisher="Altium Limited"
Q1 Q3 Q8: library part CMP-1048-00828-1, "45 V, 0.5 A, NPN Transistor, 3-Pin SOT-23, Pb-Free, Tape and Reel", Manufacturer="On Semiconductor", PartNumber=BCX19LT1G, ComponentLink1Description="Manufacturer URL", ComponentLink1URL=http://www.onsemi.com/, ComponentLink2Description=Datasheet, ComponentLink2URL=http://www.onsemi.com/pub_link/Collateral/BCX17LT1-D.PDF, ComponentLink3Description="Package Specification", ComponentLink3URL=http://www.onsemi.cn/pub_link/Collateral/318-08.PDF, DatasheetVersion="Rev. 7", IC Continuous (A)=0.5, Mounting Technology="Surface Mount", PackageDescription="3-Pin Small Outline Transistor, Body 2.92 x 1.3 mm, Pitch 0.95 mm", PackageReference=SOT-23-3-318-08, PackageVersion="Rev. AP, 11/2009", Packing="Tape and Reel", Polarity=NPN, RoHS=TRUE
Q2: library part CMP-07173-000101-1, "MOSFET N-CH 50V 220MA SOT-23", Case/Package=SOT-23, Continuous Drain Current (ID)=220mA, Drain to Source Breakdown Voltage=50V, Drain to Source Resistance=3.5R, Gate to Source Voltage (Vgs)=20V, Input Capacitance=27pF, Max Operating Temperature=150°C, Max Power Dissipation=360mW, Min Operating Temperature=-55°C, On-State Resistance=6R, Package Quantity=1, Threshold Voltage=1.3V, Contact Plating=Tin, Current Rating=220mA, Drain to Source Voltage (Vdss)=50V, Dual Supply Voltage=50V, Element Configuration=Single, Fall Time=9ns, Height=0.93mm, Lead Free="Lead Free", Length=2.92mm, Mount="Surface Mount", Nominal Vgs=1.3V, Number of Elements=1, Number of Pins=3, Packaging="Tape and Reel", Power Dissipation=360mW, Radiation Hardening=No, Rds On Max=3.5R, REACH SVHC="No SVHC", Rise Time=9ns, Termination=SMD/SMT, Turn-Off Delay Time=20ns, Turn-On Delay Time=2.5ns, Voltage Rating (DC)=50V, Weight=0.03g, Width=1.3mm
Q4 Q5 Q6: library part CMP-00196-65873332-1, "IRF3205LPBF 55V Single N-Channel HEXFET Power MOSFET in a TO-262 package, TO262-3, RoHS", Case/Package=TO-262, Continuous Drain Current (ID)=110A, Drain to Source Breakdown Voltage=55V, Drain to Source Resistance=8mΩ, Gate to Source Voltage (Vgs)=20V, Input Capacitance=3.247nF, Max Junction Temperature (Tj)=175°C, Max Power Dissipation=200W, Min Operating Temperature=-55°C, Package Quantity=1000, Threshold Voltage=4V, Current Rating=110A, Drain to Source Voltage (Vdss)=55V, Fall Time=65ns, Height=9.65mm, Lead Free="Contains Lead, Lead Free", Length=10.668mm, Lifecycle Status=Production, Max Operating Temperature=175°C, Mount="Through Hole", NexarPartId=65873332, Number of Elements=1, Number of Pins=3, On-State Resistance=8mΩ, Packaging=Bulk, Power Dissipation=200W, Radiation Hardening=No, Rds On Max=8mΩ, REACH SVHC="No SVHC", Rise Time=101ns, RoHS=Compliant, Schedule B="8541290080, 8541290080", Turn-Off Delay Time=50ns, Turn-On Delay Time=14ns, Voltage Rating (DC)=55V, Width=4.826mm
R1 R2 R3 R4 R5 R6 R9 R10 R11 R12 R13 R14 R15 R16 R17 R18 R19 R20 R21 R22 R23 R24 R25 R26 R27 R28 R29 R30 R31 R32 R34 R35 R36 R37 R38 R39 R40 R41 R42 R43 R44 R45 R46 R47 R48 R49 R50 R51 R52 R53 R54 R55 R56: library part "Resistor SMD", "Resistor", LatestRevisionDate=17-Jul-2002, LatestRevisionNote="Re-released for DXP Platform.", PackageDescription="Axial Device, Thru-Hole; 2 Leads; 0.4 in Pin Spacing", PackageReference=AXIAL-0.4, Published=8-Jun-2000, Publisher="Altium Limited"
R7 R8 R33: library part CMP-1747-00001-8, "TRIMMER 10K OHM 0.5W PC PIN TOP", Color=Blue, Insulation Resistance=1GR, Max Operating Temperature=125°C, Max Power Dissipation=500mW, Min Operating Temperature=-55°C, Package Quantity=50, Resistance=10kR, Resistance Tolerance=10%, Resistor Type=Cermet, Temperature Coefficient=100ppm/°C, Contact Plating=Tin, Depth=4.83mm, Height=11.55mm, Lead Free="Lead Free", Length=9.53mm, Military Standard=Not, Mount="Through Hole", Number of Turns=25, Packaging=Rail/Tube, Power Rating=500mW, Radiation Hardening=No, Reach SVHC Compliant=Yes, RoHS Compliant=Yes, Series=3296, Taper=Linear, Technology=CERMET, Termination=Pin, Tolerance=10%, Weight=0.03oz, Width=9.53mm
S1: "DIP Switch, 6 Position, SPST", LatestRevisionDate=17-Jul-2002, LatestRevisionNote="Re-released for DXP Platform.", PackageDescription="DIP Switch; 12 Leads", PackageReference=DIP-12/SW, Published=24-Mar-1999, Publisher="Altium Limited"
T1 T2: "8 Position Terminal Block Header, Male Pins, Shrouded (4 Side) 0.150 (3.81mm) 90Â°, Right Angle - Through Hole", Package=None, Availability="In Stock", Check_prices=https://www.snapeda.com/parts/1803332/Phoenix+Contact/view-part/?ref=eda, MF="Phoenix Contact", MP=1803332, Price=None, Purchase-URL=https://pricing.snapeda.com/search?q=1803332&ref=eda, SnapEDA_Link=https://www.snapeda.com/parts/1803332/Phoenix+Contact/view-part/?ref=snap
U1: library part CMP-04858-000027-1, "IC OSC SGL TIMER 100KHZ 8-SOIC", Case/Package=SOIC, Frequency=100kHz, High Level Output Current=-200mA, Low Level Output Current=200mA, Max Operating Temperature=70°C, Max Supply Voltage=16V, Min Operating Temperature=0°C, Min Supply Voltage=4.5V, Nominal Supply Current=2mA, Operating Supply Current=10mA, Package Quantity=2500, Quiescent Current=15mA, Height=1.58mm, Lead Free="Lead Free", Length=4.9mm, Mount="Surface Mount", Number of Pins=8, Number of Timers/Counters=1, Packaging="Tape and Reel", Radiation Hardening=No, RoHS Compliant=Yes, Series=-, Supply Current=2mA, Weight=0.002561oz, Width=3.91mm
U3: library part CMP-2000-06545-1, "Simple Switcher(R) Power Converter 150 kHz Step-Down Voltage Regulator, 3 A, 4.5 to 40 V, -40 to 125 degC, 5-Pin TO-263 (KTT), Green (RoHS & no Sb/Br), Tape and Reel", Manufacturer="Texas Instruments", Operating Temperature Max=125°C, Operating Temperature Min=-40°C, Operating Temperature Range=-40°Cto+125°C, Output Current=3A, Output Voltage=37V, Package Description="5-Pin Plastic Flange Mount, Body 10.16 x 8.925 mm, Pitch 1.7 mm", Package Reference=KTT5, Package Version="4200577-4/G, 01/2013", PartNumber=LM2596, Primary Input Voltage=40V, Voltage Regulator Case Style=TO-263, Datasheet URL=http://www.ti.com/lit/ds/symlink/lm2596.pdf, Datasheet Version="Rev. C, 04/2013", Manufacturer URL=http://www.ti.com/, Mounting Technology=SurfaceMount, MSL=MSL3-168hours, No. of Outputs=1, No. of Pins=5, Number of Outputs=1, Package URL=http://www.ti.com/litv/pdf/mpsf007e, SVHC=NoSVHC(19-Dec-2012)
U4: "Case Plastic, ABS Black Hand Held, Split Sides 3.520 L x 2.740 W (89.41mm x 69.60mm) X 0.980 (24.89mm)", Package="Raspberry Pi", Availability="In Stock", Check_prices=https://www.snapeda.com/parts/RASPBERRY%20PI%203%20MODEL%20B+/Raspberry+Pi/view-part/?ref=eda, MF="Raspberry Pi", MP="RASPBERRY PI 3 MODEL B+", Price=None, Purchase-URL="https://pricing.snapeda.com/search/part/RASPBERRY PI 3 MODEL B+/?ref=eda", SnapEDA_Link=https://www.snapeda.com/parts/RASPBERRY%20PI%203%20MODEL%20B+/Raspberry+Pi/view-part/?ref=snap
U5: library part CMP-04917-000014-1, "IC REG LINEAR 15V 1A TO220-3", Dropout Voltage=2V, Manufacturer="Texas Instruments", Max Junction Temp=+150°C, Max Supply Voltage=30V, Min Supply Voltage=7.5V, Nominal Supply Current=8mA, Output Current=1.5A, Output Voltage=15V, Package=NDE0003B, Temperature="0°C to +125°C", Temperature Range High=+125°C, Temperature Range Low=0°C, Accuracy Percentage=3%, Automotive=No, Category=IC, ComponentLink2Description=Datasheet, ComponentLink2URL=http://www.ti.com/lit/ds/symlink/lm7800.pdf, Device Class L1="Integrated Circuits (ICs)", Device Class L2="Power Management ICs", Device Class L3="Voltage Regulators - Linear", Digikey Description="IC REG LINEAR 15V 1A TO220-3", Height=19.55mm, Ipc Land Pattern Name=TO-220, Lead Free=Yes, Manufacturer Part Number=LM7815CT/NOPB, Mouser Description="Linear Voltage Regulators 15 Volt Reg", Number of Outputs=1, Octopart=https://octopart.com/lm7815ct%2Fnopb-texas+instruments-23919376, Output Type=Fixed, RoHS=TRUE, Standoff Height=3.3mm

## Free pads (board coordinates)
  round 3 hole 3.2: 3(10.922,109.093) 3(12.192,6.223) 3(126.051,109.093) 3(147.809,6.222)
  round 1.95 hole 1.3: NO(14.201,13.879)
  round 6.2 hole 3: S3(133.338,103.392)
  round 6.4 hole 3: S4(75.338,103.392)

## Via types
v1: diameter 1.27, hole 0.711, Top Layer to Bottom Layer, 200 vias
v2: diameter 1.2, hole 0.7, Top Layer to Bottom Layer, 8 vias

## Nets (pads, with @x,y where several pads share a name; then routed paths per layer and width w, separated by ;. In a path a pad name is that pad's centre, name@x,y a point inside that pad or via, vN(x,y) a via of type N, cw(c..) or ccw(c..) an arc to the next point about the centre after c; other vN are vias at no path point)
3.7V: CCH1.3 CH1.3 HO1.1 HO1.4 | length 112.1
  Top Layer w1: HO1.4@29.164,32.466 34.472,32.466 51.978,14.961 51.978,11.624 52.857,10.744 69.341,10.744 71.119,8.966 CCH1.3@71.119,5.629
  Bottom Layer w1: CCH1.3@71.119,5.629 71.119,8.203 78.841,8.203 86.665,16.027 96.121,16.027 ; CH1.3@91.397,20.752 96.121,16.027 ; HO1.1@112.689,13.366 101.442,13.366 98.781,16.027 96.121,16.027
3V3: ARD1.17 Q2.1 R24.2 | length 186.5
  Top Layer w0.4: v1(9.336,90.377) 10.001,90.377 16.271,96.647 17.72,96.647 18.517,97.444 v1(18.517,106.104) ; v1(53.898,104.796) 53.732,104.63 53.732,103.949 53.569,103.786 53.569,91.267 54.06,90.777 58.905,90.777 59.131,90.551 59.131,77.546 61.351,75.327 61.351,53.451 60.732,52.832 60.732,46.838 62.313,45.256 v1(62.313,42.454)
  Bottom Layer w0.4: v1(9.336,90.377) 9.336,82.625 11.899,80.062 12.23,80.062 12.465,80.296 Q2.1@12.465,85.478 ; v1(18.517,106.104) 21.947,106.104 24.276,108.433 35.795,108.433 36.458,107.769 45.52,107.769 ARD1.17@48.514,104.775 48.535,104.796 v1(53.898,104.796) ; v1(62.313,42.454) 62.393,42.454 63.198,43.259 98.245,43.259 100.34,41.164 R24.2@102.272,41.164
3V3_Rasp: A1.1 P3.4 P4.4 S1.3 S1.4 U4.1 | length 335.6
  Top Layer w0.4: A1.1@25.4,53.467 26.721,54.788 26.721,56.82 27.229,57.328 28.46,57.328 30.519,55.269 31.944,55.269 32.179,55.504 32.179,58.604 30.467,60.315 30.467,76.691 30.702,76.925 34.757,76.925 34.991,77.16 34.991,80.065 S1.4@37.592,82.666 S1.3@37.592,85.206 ; v1(39.319,57.713) 37.074,57.713 36.563,57.201 36.563,52.25 37.537,51.276 37.537,51.234 39.088,51.234 54.127,36.195 55.092,36.195 55.419,36.522 v1(63.037,36.522) ; v1(79.908,37.008) 78.969,37.948 78.969,46.152 ; U4.1@80.208,55.662 78.969,54.422 78.969,46.152 ; P3.4@110.378,103.943 113.716,100.605 113.716,70.407 v1@123.738,60.384 ; v1(120.82,58.684) 120.614,58.684 120.352,58.946 117.188,58.946 117.069,58.827 117.069,48.489 116.688,48.108 116.688,15.773 ; P4.4@125.561,4.142 125.561,3.844 124.904,3.187 124.904,2.978 124.67,2.744 115.848,2.744 115.613,2.978 115.613,7.285 116.688,8.359 116.688,15.773 ; 78.969,46.152 108.915,16.205 116.256,16.205 116.688,15.773
  Bottom Layer w0.4: A1.1@25.4,53.467 26.485,54.552 26.582,54.552 26.767,54.737 29.415,54.737 29.451,54.774 29.451,56.903 29.686,57.137 29.699,57.137 30.812,58.25 38.782,58.25 v1(39.319,57.713) ; v1(63.037,36.522) 62.129,35.615 58.145,35.615 57.404,34.874 57.404,33.249 57.988,32.664 68.924,32.664 71.071,34.811 71.53,34.811 71.764,35.046 71.764,39.125 72.136,39.497 77.419,39.497 v1(79.908,37.008) ; v1(120.82,58.684) 122.113,58.684 123.723,60.295 v1(123.723,60.369)
5V: C6.P C7.P D3.1 K2.A1 K2.COM L1.2 OC1.4 OC2.4 OC3.1 OC4.4 OC5.1 OC7.1 OC8.1 R32.2 R49.2 S1.1 U3.4 | length 412.7
  Top Layer w0.8: v1(121.093,14.876) 124.227,14.876 R32.2@124.495,15.143
  Top Layer w1: K2.A1@23.931,24.066 23.546,24.451 23.546,33.944 23.226,34.263 L1.2@23.226,36.323 23.226,43.168 v1(24.906,44.847) ; S1.1@37.592,90.286 37.592,104.578 41.557,108.543 42.763,108.543 44.106,109.886 v1(44.179,109.886) ; v1(53.706,85.299) 53.706,88.032 52.327,89.41 52.327,103.223 52.248,103.302 52.248,106.022 51.841,106.429 v1(51.841,106.502) 53.253,107.914 v1@55.058,107.914 ; v1(69.309,109.957) 69.309,109.884 69.872,109.321 69.872,49.768 73.901,45.738 v1(73.901,37.939) ; C6.P@93.911,92.239 92.685,92.239 92.253,92.671 92.253,102.914 92.685,103.346 C7.P@94.008,103.346
  Bottom Layer w0.8: 44.729,14.763 OC4.4@46.987,14.763 48.519,14.763 49.124,15.367 49.124,23.546 ; R49.2@53.301,80.655 53.301,84.277 ; 70.688,25.968 72.771,25.968 ; 72.517,31.394 72.517,26.222 72.771,25.968 ; v1(73.901,37.939) 73.987,37.939 OC1.4@74.27,38.222 ; 74.27,35.061 OC1.4@74.27,38.222 ; OC1.4@74.75,38.222 OC1.4@74.27,38.222 ; 80.76,25.968 OC2.4@74.406,25.968 72.771,25.968 ; 83.21,28.418 118.288,28.418 ; 117.145,16.18 118.167,15.158 118.288,15.278 OC3.1@119.638,15.278 119.791,15.125 120.716,15.125 120.966,14.876 v1(121.093,14.876) ; 118.215,14.949 117.949,14.888 117.329,14.744 117.329,9.454 117.798,8.985 OC5.1@119.694,8.985 ; 119.405,23.978 OC7.1@119.405,28.418 ; OC8.1@119.685,35.285 118.444,35.285 117.881,34.722 117.881,28.825 118.288,28.418 ; OC7.1@119.732,28.418 OC7.1@119.405,28.418 ; 118.288,28.418 OC7.1@119.405,28.418
  Bottom Layer w1: U3.4@15.499,49.192 15.499,47.066 16.108,46.457 23.369,46.457 24.906,44.92 v1(24.906,44.847) 27.423,44.847 29.439,46.863 35.134,46.863 D3.1@35.134,46.845 ; K2.COM@17.931,26.066 19.931,24.066 K2.A1@23.931,24.066 35.426,24.066 44.729,14.763 ; v1(44.179,109.886) 48.458,109.886 v1(51.841,106.502) ; 49.124,23.546 49.606,24.028 63.12,24.028 63.388,23.76 68.48,23.76 70.688,25.968 ; 53.301,84.277 53.706,84.682 v1(53.706,85.299) ; v1(55.298,107.857) 55.298,109.224 57.083,111.01 71.168,111.01 72.221,109.957 ; v1(69.309,109.957) 72.221,109.957 ; 72.517,31.394 73.033,31.91 73.033,33.825 74.27,35.061 ; 80.76,25.968 83.21,28.418 ; C7.P@94.008,103.346 93.163,103.346 88.342,108.168 74.01,108.168 72.221,109.957 ; 117.145,16.18 117.145,21.717 119.405,23.978
5V_RPI: A1.2 A1.4 C22.2 K2.NC P5.1 P5.2 U4.2 U4.4 | length 142.5
  Top Layer w1: K2.NC@23.931,11.866 23.931,16.438 25.679,18.186 25.679,28.981 25.157,29.503 25.157,35.444 26.684,36.971 ; A1.4@27.94,56.007 A1.2@27.94,53.467 28.804,52.603 28.804,44.656 26.684,42.537 26.684,36.971 ; v1(59.69,28.042) 40.792,28.042 33.122,35.712 27.94,35.712 26.684,36.971 ; C22.2@66.229,50.72 66.229,49.745 64.77,48.285 64.77,41.732 68.275,38.227 68.275,36.243 71.218,33.3 71.576,33.3 v1(71.628,33.249) ; U4.4@82.748,53.122 82.748,51.397 82.606,51.254 82.606,49.537 P5.2@82.796,49.346
  Bottom Layer w1: v1(59.69,28.042) 62.967,31.318 69.698,31.318 v1(71.628,33.249) ; C22.2@66.229,50.72 67.604,49.346 P5.1@80.256,49.346 P5.2@82.796,49.346 ; U4.2@80.208,53.122 U4.4@82.748,53.122
7.4V: CCH1.5 CH1.5 HO1.3 R10.2 | length 137.5
  Top Layer w1: v1(33.604,50.673) 49.471,34.806 55.516,34.806 56.147,35.436 60.502,35.436 61.088,34.851 61.088,26.653 60.376,25.941 60.376,13.679 CCH1.5@62.991,13.679 65.648,13.679 68.301,16.332 68.301,26.822 69.202,27.723 v1(78.575,27.723)
  Bottom Layer w0.8: v1(33.604,50.673) 34.015,51.084 R10.2@34.015,52.292
  Bottom Layer w1: CH1.5@52.397,6.752 59.324,13.679 CCH1.5@62.991,13.679 ; v1(78.575,27.723) 79.842,27.723 84.585,32.466 HO1.3@112.689,32.466
12V-24V-INPUT: D1.2 R23.2 T1.2 | length 69.3
  Top Layer w1: T1.2@6.873,11.176 13.665,17.968 13.748,17.968 14.405,18.626 14.405,27.599 13.665,28.339 v1(13.665,32.969)
  Bottom Layer w0.8: 34.468,29.439 37.361,32.331 R23.2@37.361,33.995
  Bottom Layer w1: T1.2@6.873,11.176 7.914,10.135 17.907,10.135 18.827,9.214 D1.2@18.827,5.988 ; v1(13.665,32.969) 18.951,32.969 22.482,29.439 34.468,29.439
A0: ARD1.19 R37.2 | length 8.2
  Bottom Layer w0.4: R37.2@41.713,96.415 45.234,96.415 ARD1.19@48.514,99.695
A1: ARD1.20 R38.2 | length 26.4
  Bottom Layer w0.4: R38.2@41.522,105.64 42.345,105.64 46.301,101.684 46.301,99.898 46.025,99.622 42.472,99.622 40.437,97.587 40.437,95.225 40.64,95.021 46.38,95.021 ARD1.20@48.514,97.155
A2: ARD1.21 R39.2 | length 34.5
  Bottom Layer w0.4: R39.2@41.496,110.755 42.096,110.755 42.412,111.072 49.18,111.072 56.413,103.838 56.413,95.733 55.296,94.615 ARD1.21@48.514,94.615
A3: ARD1.22 R40.2 | length 82.1
  Top Layer w0.4: v1(60.147,93.447) 60.147,107.137 64.056,111.046 70.241,111.046 70.917,110.369 70.917,81.89 76.427,76.38 R40.2@76.427,69.136
  Bottom Layer w0.4: ARD1.22@48.514,92.075 49.886,93.447 v1(60.147,93.447)
A4: ARD1.23 R41.2 | length 77.4
  Top Layer w0.4: v1(57.988,89.535) 57.988,74.828 58.928,73.889 v1(58.928,69.139) ; v1(103.327,68.732) 103.801,69.206 R41.2@105.012,69.206
  Bottom Layer w0.4: ARD1.23@48.514,89.535 v1(57.988,89.535) ; v1(58.928,69.139) 59.334,68.732 71.812,68.732 72.647,67.897 102.492,67.897 v1(103.327,68.732)
A5: ARD1.24 R34.2 | length 15.6
  Bottom Layer w0.4: R34.2@34.999,89.822 34.999,89.103 36.398,89.103 36.474,89.027 46.355,89.027 47.219,88.163 48.26,88.163 48.514,87.909 ARD1.24@48.514,86.995